# Altium PCB l298.PcbDoc
Units mil, origin at the board's own origin, x right, y up, seen from the top; angles counter-clockwise.
Board outline 3001.03 x 2316.03 mil, 2 copper layers (Top Layer, Bottom Layer); 23 components, 13 nets, 62 pads, 0 vias.
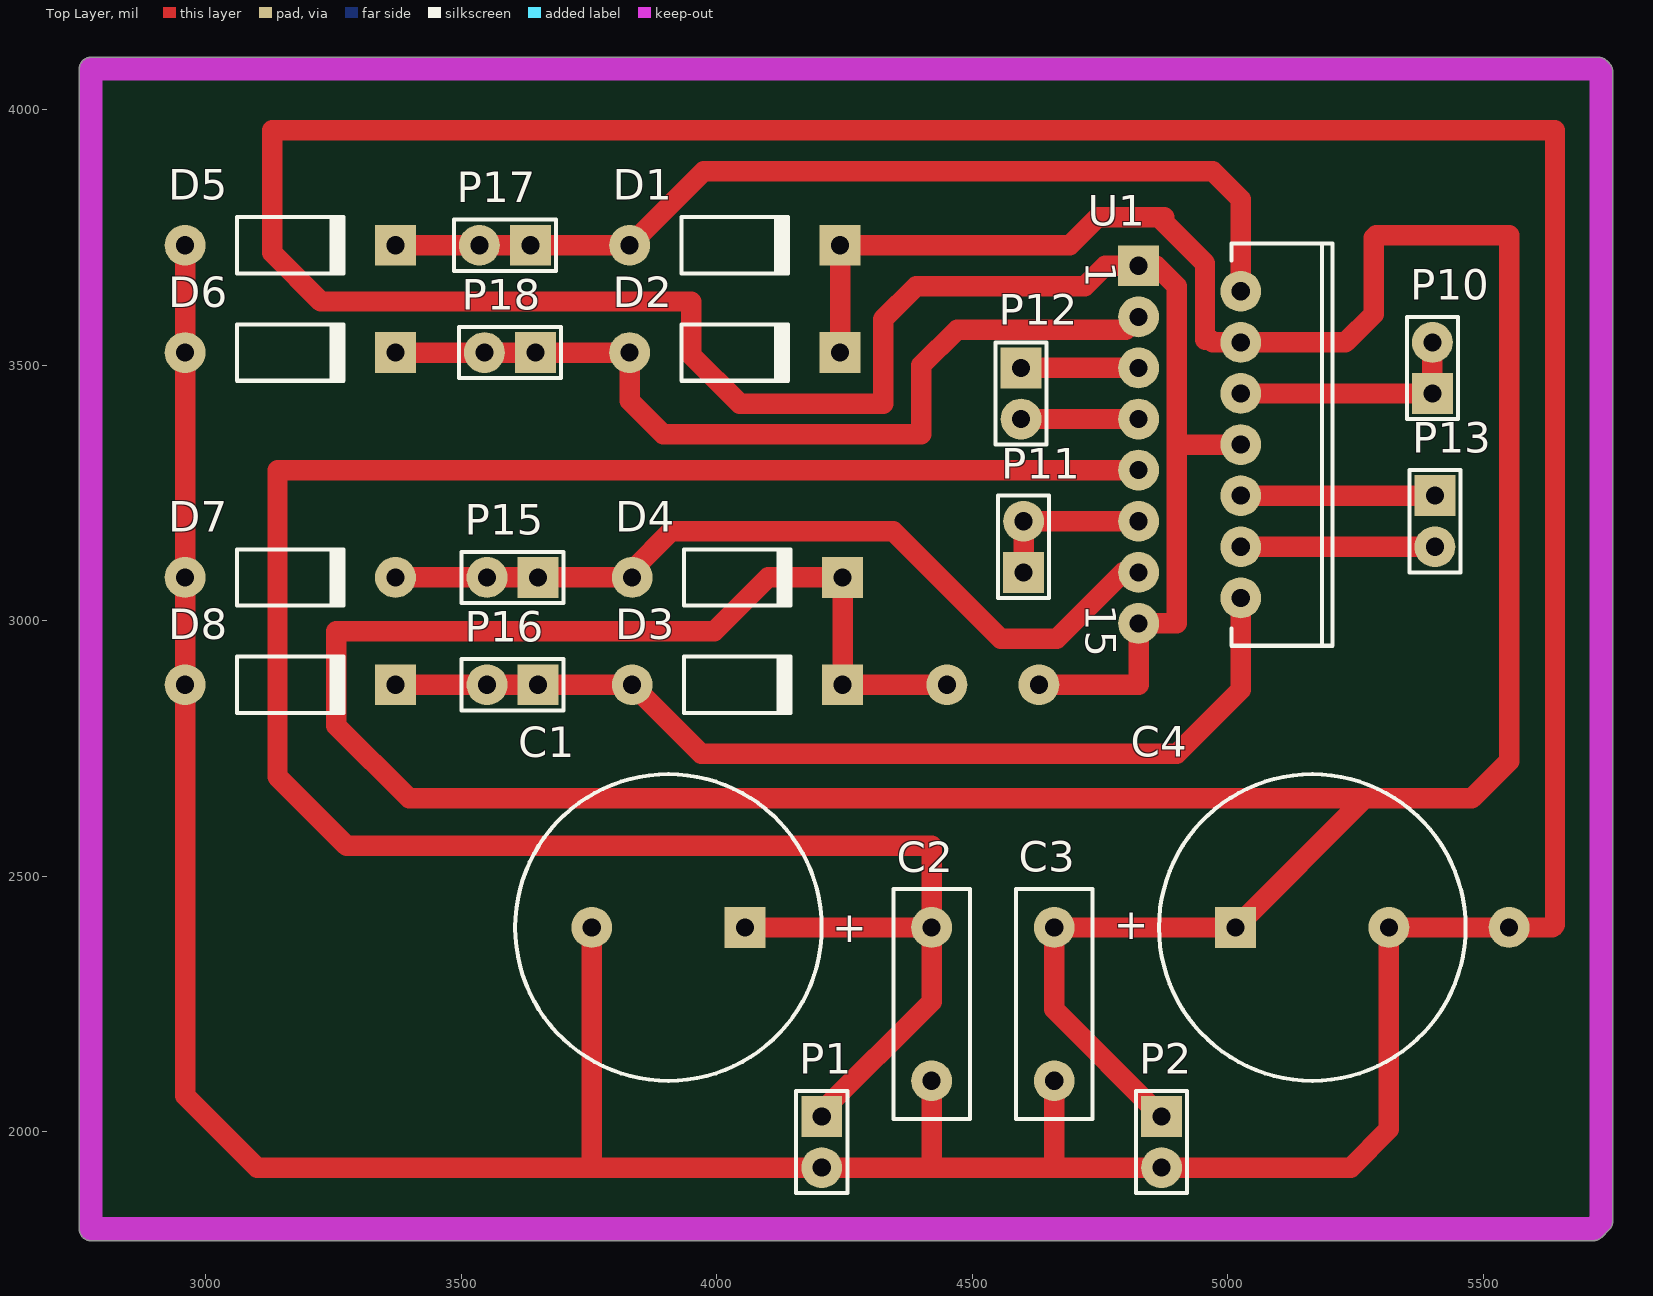
[diagram p0: Top Layer view]
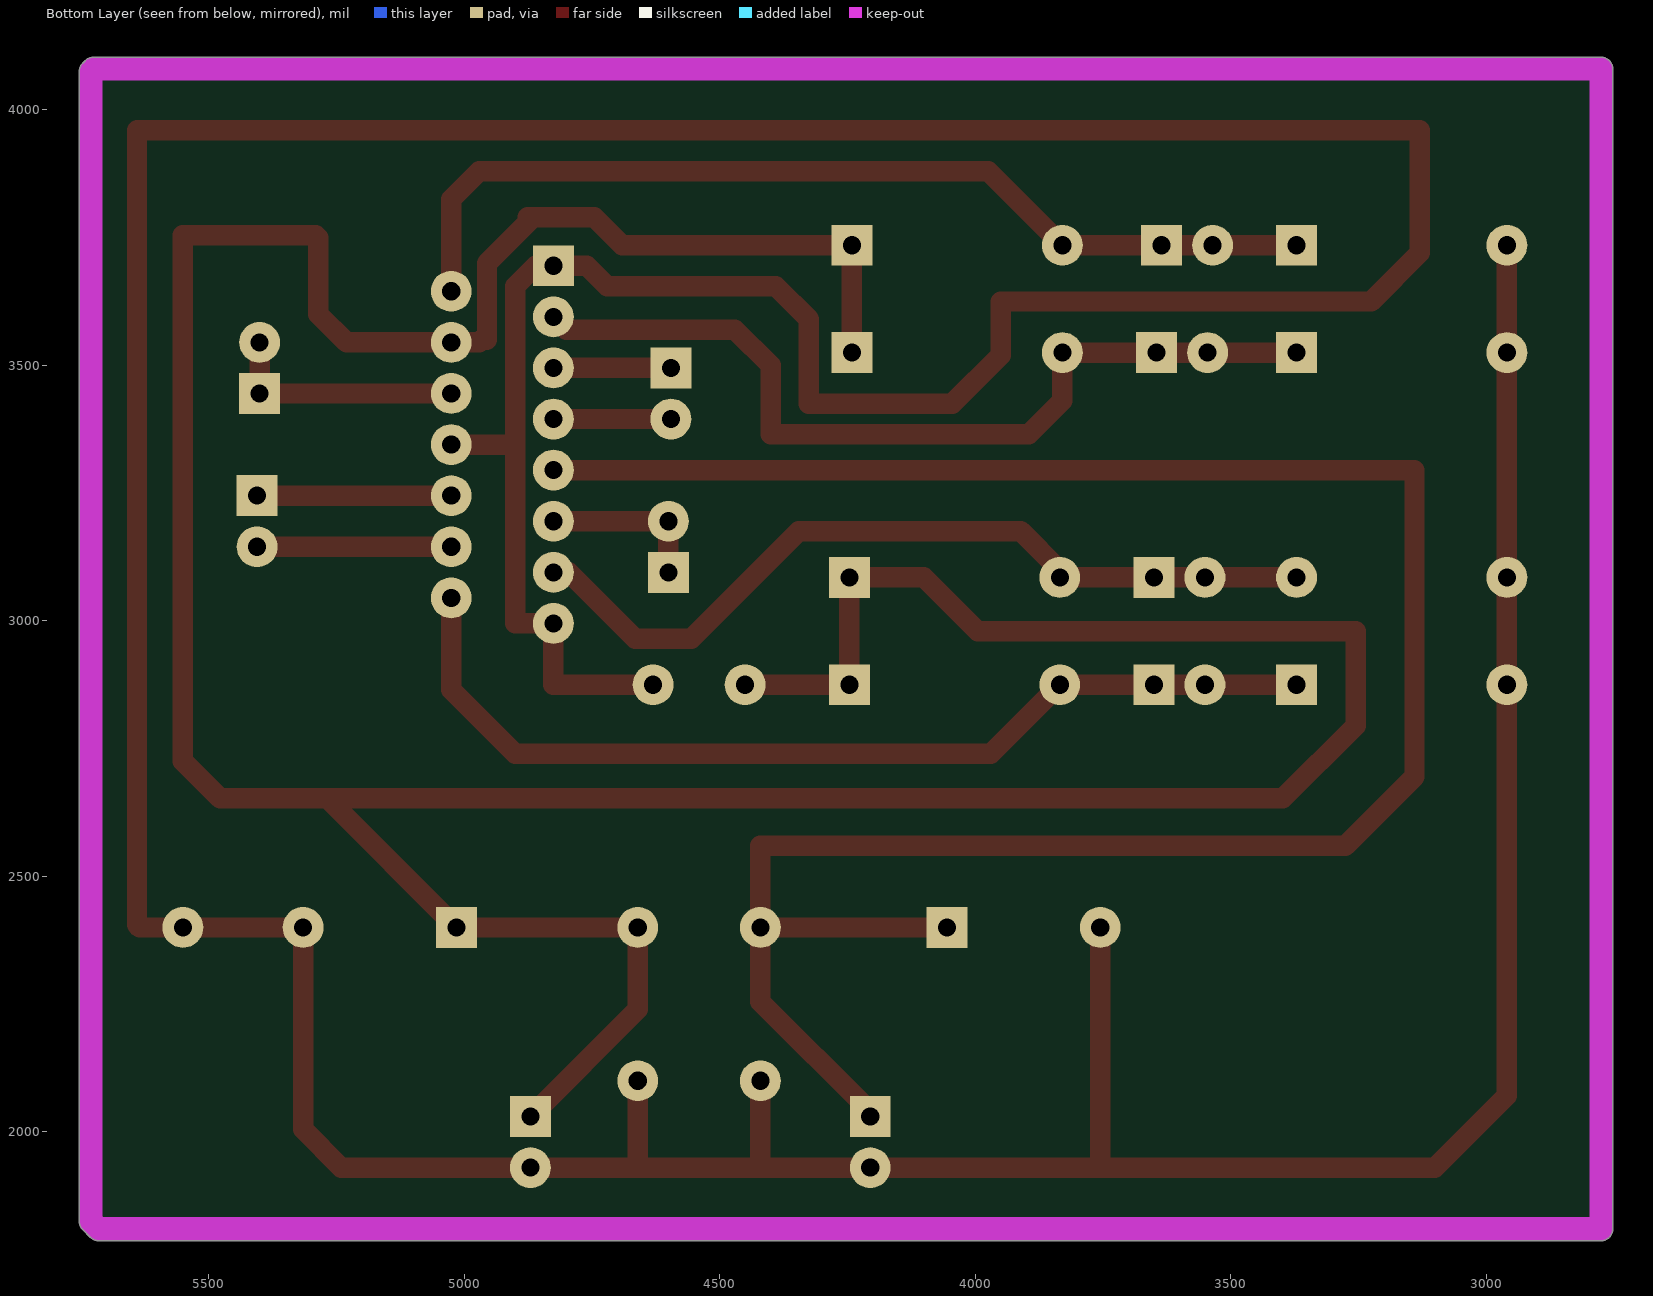
[diagram p1: Bottom Layer view, seen from below]

## Layer stack, top to bottom
Top Solder: solder mask 0.4, Solder Resist, Dk 3.5
Top Layer: signal copper 1.4
Dielectric 1: dielectric 12.6, FR-4, Dk 4.8
Bottom Layer: signal copper 1.4
Bottom Solder: solder mask 0.4, Solder Resist, Dk 3.5

## Board outline
2751.99,1810 ccw(c2775,1810) 2775,1786.98 5715,1786.98 ccw(c5715,1810) 5731.27,1793.73 5746.27,1808.73 ccw(c5730,1825) 5753.02,1825 5753.02,4075 ccw(c5730,4075) 5746.27,4091.27 5741.27,4096.27 ccw(c5725,4080) 5725,4103.02 2775,4103.02 ccw(c2775,4080) 2751.99,4080

## Design rules (kind name [scope] priority, off if disabled: settings)
Clearance [All] p1: gap=10
PolygonConnect [All] p1: connectstyle=Relief reliefconductorwidth=10 reliefentries=4 polygonreliefangle="90 Angle" airgapwidth=10
RoutingLayers [All] p1: top layer_v5=TRUE bottom layer_v5=FALSE
RoutingTopology [All] p1: topology=Daisy_Simple
RoutingVias [All] p1: holewidth=28 width=50 viastyle="Through Hole" minholewidth=28 minwidth=50 maxholewidth=28 maxwidth=50
SolderMaskExpansion [All] p1: expansion=4
Width [All] p1: maxlimit=40 minlimit=40 preferedwidth=40 minimp=50.000000 maximp=50.000000 favimp=50.000000
28 further rules are at their usual default settings.

## Components (designator, comment, footprint, x,y, rotation, side; value= is the part's Value field where it differs from the comment)
C1 "Cap Pol1" RB7.6-15 3905,2400 r0 top
C2 "Cap" RAD-0.3 4420,2250 r90 top
C3 "Cap" RAD-0.3 4660,2250 r90 top
C4 "Cap Pol1" RB7.6-15 5165,2400 r180 top
D1 "Diode 1N4001" DO-41#1 4035,3735 r0 top
D2 "Diode 1N4001" DO-41#1 4035,3525 r0 top
D3 "Diode 1N4001" DO-41#1 4040,2875 r0 top
D4 "Diode 1N4001" DO-41#1 4040,3085 r0 top
D5 "Diode 1N4001" DO-41#1 3165,3735 r0 top
D6 "Diode 1N4001" DO-41#1 3165,3525 r0 top
D7 "Diode 1N4001" DO-41#2 3165,3085 r0 top
D8 "Diode 1N4001" DO-41#1 3165,2875 r0 top
P1 "Header 2" HDR1X2 4205,2030 r270 top
P2 "Header 2" HDR1X2 4870,2030 r270 top
P10 "Header 2" HDR1X2 5400,3445 r90 top
P11 "Header 2" HDR1X2 4600,3095 r90 top
P12 "Header 2" HDR1X2 4595,3495 r270 top
P13 "Header 2" HDR1X2 5405,3245 r270 top
P15 "Header 2" HDR1X2 3650,3085 r180 top
P16 "Header 2" HDR1X2 3650,2875 r180 top
P17 "Header 2" HDR1X2 3635,3735 r180 top
P18 "Header 2" HDR1X2 3645,3525 r180 top
U1 "L298N" Multiwatt15V 4925,3345 r270 top

## Footprints (in the part's own frame and the unit in brackets; to place one, negate y for a bottom-side part, rotate by r counter-clockwise, add the part's x,y. Pads: shape width x height; smd on the part's side, far side on the other; paste and mask are expansions set on the pad)
DO-41#1 [mil] "Diode, Axial; Body 5.2 x 2.7 mm (LxDia. max), Lead Dia. 0.86 mm (max)"
  round 80 hole 35.43: 1(-205.91,0)
  rect 80x80 hole 35.43: 2(205.91,0)
  silkscreen extent -104,-55 108,55
DO-41#2 [mil] "Diode, Axial; Body 5.2 x 2.7 mm (LxDia. max), Lead Dia. 0.86 mm (max)"
  round 80 hole 35.43: 1(-205.91,0) 2(205.91,0)
  silkscreen extent -104,-55 108,55
HDR1X2 [mil] "Connector; Header; 2 Position"
  rect 80x80 hole 35.43: 1(0,0)
  round 80 hole 35.43: 2(100,0)
  silkscreen extent -50,-50 150,50
Multiwatt15V [mil] "TO, Thru-Hole, Vertical, Heatsink Mounted; 15 Bent Staggered Leads; Pitch 1.27 mm"
  rect 80x80 hole 35.43: 1(-350,-100)
  round 80 hole 35.43: 2(-300,100) 3(-250,-100) 4(-200,100) 5(-150,-100) 6(-100,100) 7(-50,-100) 8(0,100) 9(50,-100) 10(100,100) 11(150,-100) 12(200,100) 13(250,-100) 14(300,100) 15(350,-100)
  silkscreen extent -394,82 394,279
RAD-0.3 [mil] "Radial Cap, Thru-Hole; 2 Leads; 0.3 in Pin Spacing"
  round 80 hole 35.43: 1(-150,0) 2(150,0)
  silkscreen extent -225,-75 225,75
RB7.6-15 [mil] "Polarized Capacitor (Radial); 2 Leads"
  rect 80x80 hole 35.43: 1(150,0)
  round 80 hole 35.43: 2(-150,0)
  silkscreen extent -300,-300 300,300

## Part data
C1 C4: "Polarized Capacitor (Radial)"
C2 C3: "Capacitor"
D1 D2 D3 D4 D5 D6 D7 D8: "1 Amp General Purpose Rectifier"
P1 P2 P10 P11 P12 P13 P15 P16 P17 P18: "Header, 2-Pin"
U1: "Dual Full Bridge Driver"

## Free pads (board coordinates)
  round 80 hole 35.43: 0(4450,2875) 2(5550,2400) 3(4630,2875)

## Nets (pads, with @x,y where several pads share a name; then routed paths per layer and width w, separated by ;. In a path a pad name is that pad's centre, name@x,y a point inside that pad or via, vN(x,y) a via of type N, cw(c..) or ccw(c..) an arc to the next point about the centre after c; other vN are vias at no path point)
GND: C1.2 C2.1 C3.1 C4.2 D5.1 D6.1 D7.1 D8.1 P1.2 P2.2 pad.2 pad.3 U1.1 U1.8 U1.15 | length 13304.8
  Top Layer w40: D5.1 D6.1 D7.1 D8.1 2959.09,2070.91 3100,1930 3755,1930 ; C1.2 3755,1930 ; C2.1 4420,1930 ; pad.3@4615,2875 pad.3 4825,2875 U1.15 4900,2995 4900,3655 4860,3695 U1.1 4760,3695 4720,3655 4390,3655 4325,3590 4325,3425 4045,3425 3950,3520 3950,3625 3225,3625 3130,3720 3130,3960 5640,3960 5640,2405 5635,2400 pad.2 C4.2 5315,2005 5240,1930 P2.2 4665,1930 ; C3.1 4660,1935 4665,1930 ; 4912.5,3345 U1.8 ; 3755,1930 P1.2 4420,1930 ; 4420,1930 4665,1930
NetC1_1: C1.1 C2.2 P1.1 U1.9 | length 4605
  Top Layer w40: C1.1 C2.2 ; P1.1 4205,2040 4420,2255 C2.2 ; U1.9 3140,3295 3140,2695 3275,2560 4420,2560 C2.2
NetC3_2: C3.2 C4.1 D1.2 D2.2 D3.2 D4.2 P2.1 pad.0 U1.4 | length 8122.7
  Top Layer w40: D2.2 D1.2 4690,3735 4745,3790 4865,3790 ; pad.0 D3.2 D4.2 4100,3085 3995,2980 3255,2980 3255,2795 3397.5,2652.5 5267.5,2652.5 ; P2.1 4660,2240 C3.2 C4.1 5267.5,2652.5 ; 4875,3790 4865,3790 ; 4955,3550 4955,3700 4865,3790 ; 4965,3550 4970,3545 U1.4 5230,3545 5285,3600 5285,3750 5290,3755 5550,3755 5550,2725 5477.5,2652.5 5267.5,2652.5
NetD1_1: D1.1 D5.2 P17.1 P17.2 U1.2 | length 1916.9
  Top Layer w40: D5.2 P17.2 P17.1 D1.1 3974.09,3880 4970,3880 5025,3825 U1.2
NetD2_1: D2.1 D6.2 P18.1 P18.2 U1.3 | length 1749.8
  Top Layer w40: D6.2 P18.2 P18.1 D2.1 3829.09,3430.91 3895,3365 4400,3365 4400,3500 4470,3570 4800,3570 U1.3
NetD3_1: D3.1 D8.2 P16.1 P16.2 U1.14 | length 1941.8
  Top Layer w40: D8.2 P16.2 P16.1 D3.1 3969.09,2740 4900,2740 5025,2865 U1.14
NetD4_1: D4.1 D7.2 P15.1 P15.2 U1.13 | length 1640.5
  Top Layer w40: D7.2 P15.2 P15.1 D4.1 3834.09,3099.09 3910,3175 4345,3175 4555,2965 4665,2965 4795,3095 U1.13
NetP10_1: P10.1 P10.2 U1.6 | length 475
  Top Layer w40: U1.6 P10.1 P10.2
NetP11_1: P11.1 P11.2 U1.11 | length 325
  Top Layer w40: P11.1 P11.2 U1.11
NetP12_1: P12.1 U1.5 | length 230
  Top Layer w40: P12.1 U1.5
NetP12_2: P12.2 U1.7 | length 230
  Top Layer w40: P12.2 U1.7
NetP13_1: P13.1 U1.10 | length 380
  Top Layer w40: U1.10 P13.1
NetP13_2: P13.2 U1.12 | length 380
  Top Layer w40: U1.12 P13.2

## Keep-outs
Keep-Out Layer:
  lines w46: 2775,1810 2775,4080 5725,4080 5730,4075 5730,1825 5715,1810 2775,1810

## Text inside footprints (layer, text, board x,y; h text height)
C1: Top Overlay "+" at 4225.15,2370.99 h59.06
C4: Top Overlay "+" at 4844.85,2429.01 h59.06 r180
U1: Top Overlay "15" at 4721.65,3032.4 h59.06 r270; Top Overlay "1" at 4721.65,3704.06 h59.06 r270